# Altium PCB PCB1.PcbDoc
Units mm, origin at the board's own origin, x right, y up, seen from the top; angles counter-clockwise.
Board outline 40 x 30 mm, 2 copper layers (Top Layer, Bottom Layer); 20 components, 9 nets, 40 pads, 357 vias.
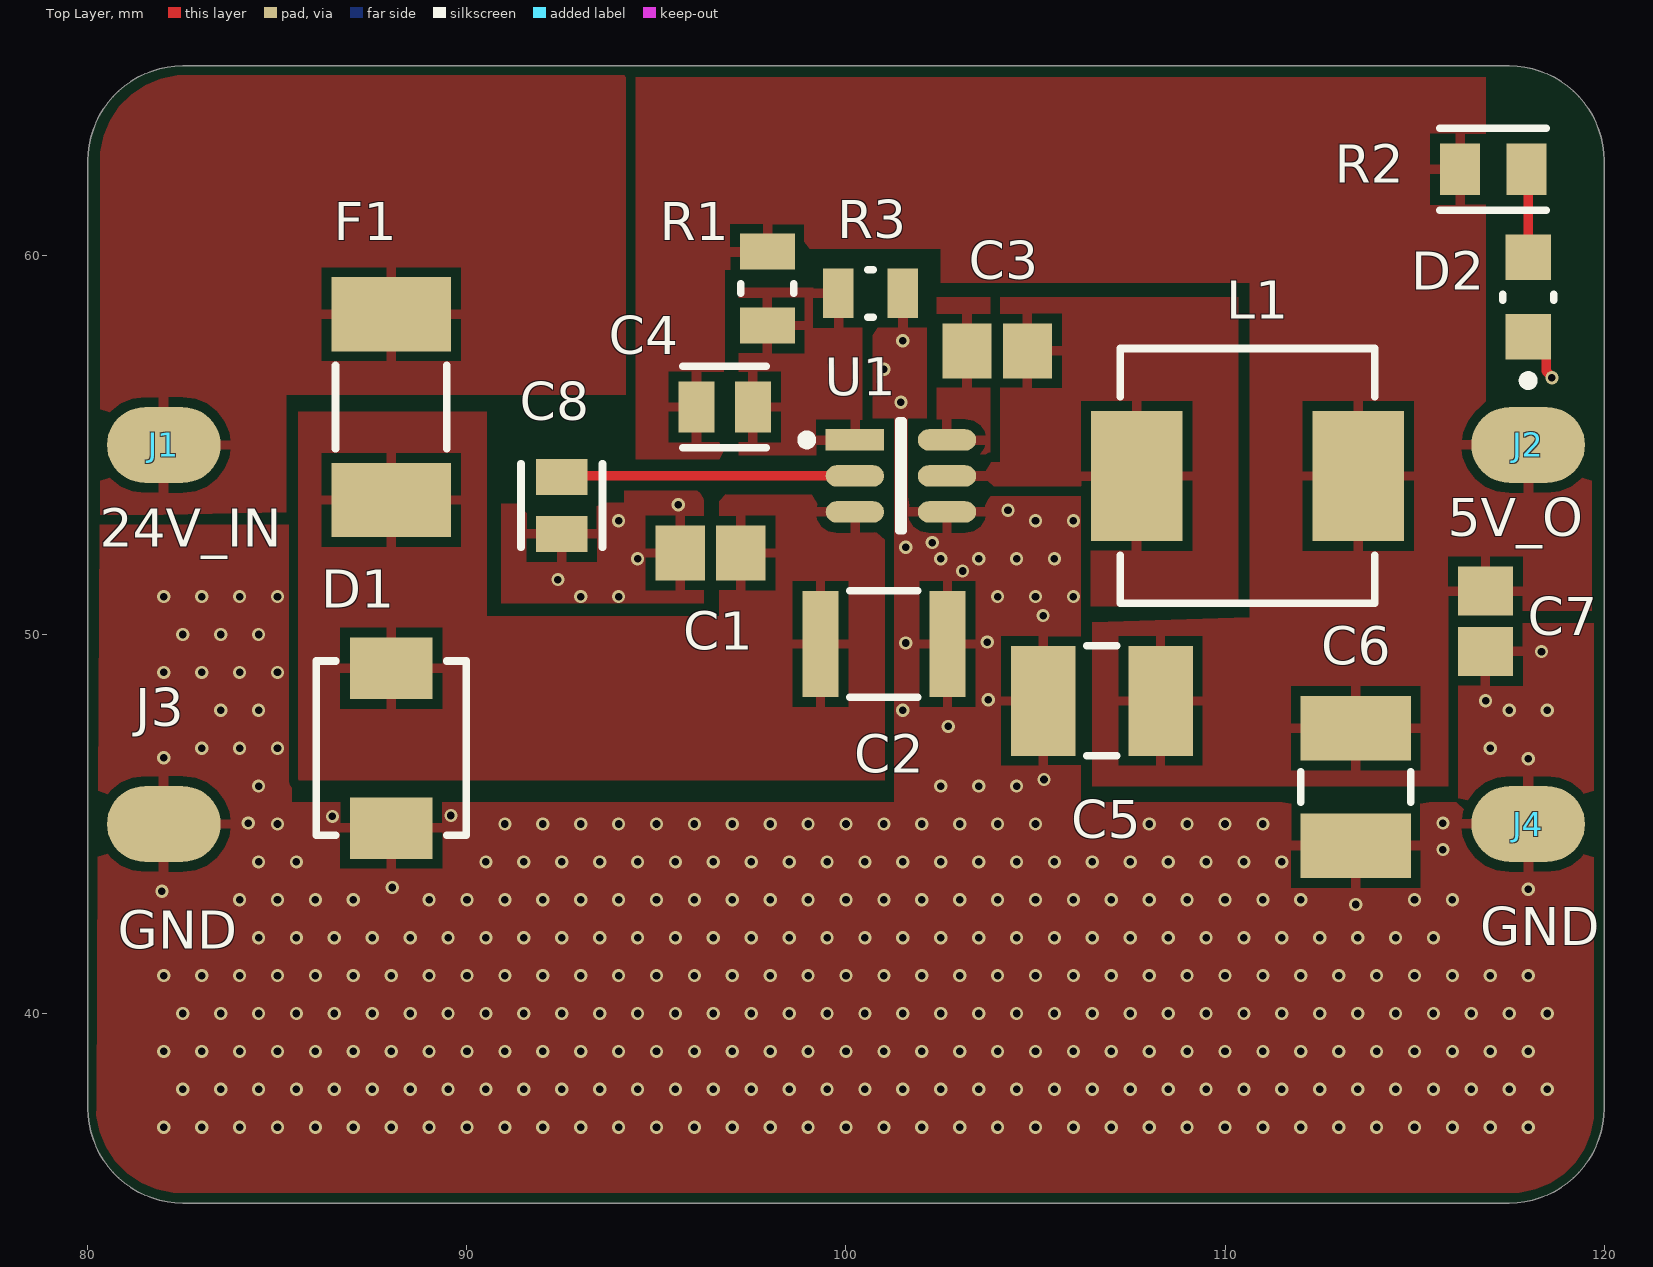
[diagram p0: Top Layer view]
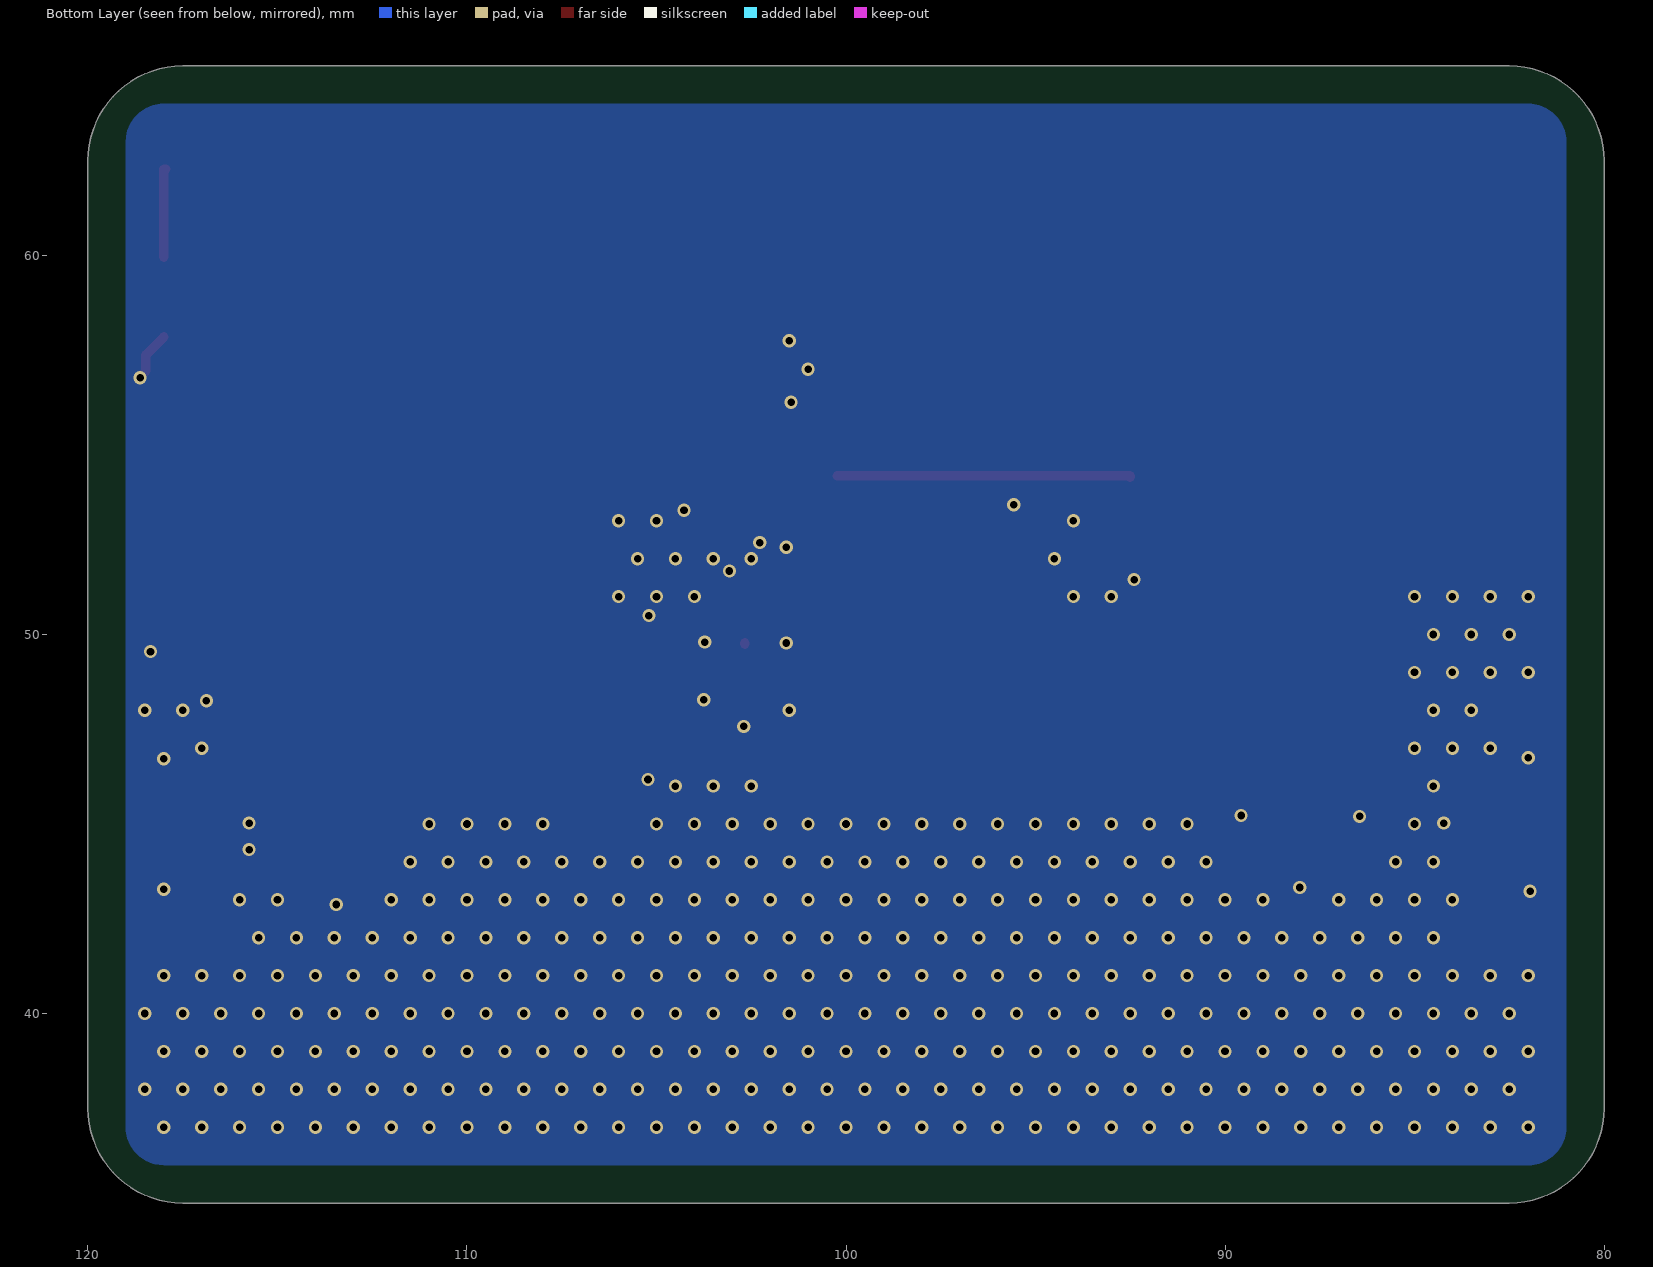
[diagram p1: Bottom Layer view, seen from below]
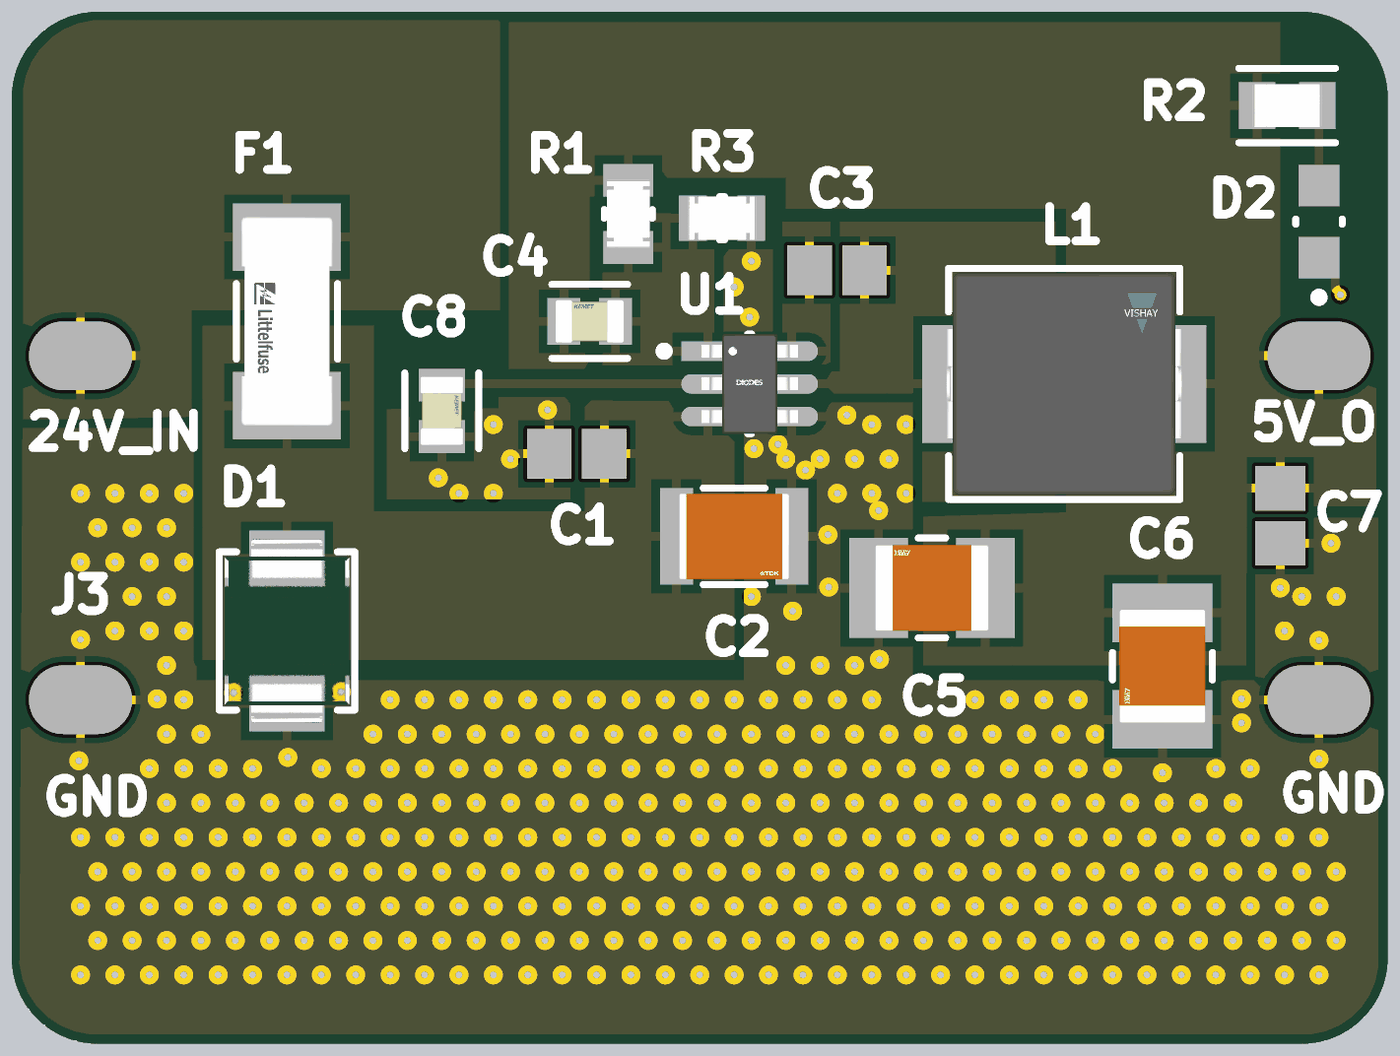
[diagram p2: 3D render of the assembled board from above, using the file's embedded part models]

## Layer stack, top to bottom
Top Solder: solder mask 0.0102, Solder Resist, Dk 3.5
Top Layer: signal copper 0.0356
Dielectric 1: dielectric 0.32, FR-4, Dk 4.8
Bottom Layer: signal copper 0.0356
Bottom Solder: solder mask 0.0102, Solder Resist, Dk 3.5

## Board outline
80,37.5 80,62.5 cw(c82.5,62.5) 82.5,65 117.5,65 cw(c117.5,62.5) 120,62.5 120,37.5 cw(c117.5,37.5) 117.5,35 82.5,35 cw(c82.5,37.5)

## Design rules (kind name [scope] priority, off if disabled: settings)
Clearance [All] p1: gap=0.254 ignorepadtopadclearanceinfootprint=FALSE
MinimumSolderMaskSliver pads [InPadClass('All Pads')] p1: minsoldermaskwidth=0.09
MinimumSolderMaskSliver [All] p2: minsoldermaskwidth=0.1
PolygonConnect ground_vias [InNet('GND') vs InNet('GND')] p1: thpad.connectstyle=Direct thpad.reliefconductorwidth=0.254 thpad.reliefentries=4 thpad.polygonreliefangle="90 Angle" thpad.airgapwidth=0.254 smdpad.connectstyle=Relief smdpad.reliefconductorwidth=0.254 smdpad.reliefentries=4 smdpad.polygonreliefangle="90 Angle" smdpad.airgapwidth=0.254 via.connectstyle=Direct via.reliefconductorwidth=0.254 via.reliefentries=4 via.polygonreliefangle="90 Angle" via.airgapwidth=0.254
PolygonConnect [All] p2: connectstyle=Relief reliefconductorwidth=0.254 reliefentries=4 polygonreliefangle="90 Angle" airgapwidth=0.254
RoutingVias [All] p1: holewidth=0.2 width=0.35 viastyle="Through Hole" minholewidth=0.2 minwidth=0.35 maxholewidth=0.711 maxwidth=1.27
SilkToSolderMaskClearance [IsPad] p1: minsilkscreentomaskgap=0.15 clearancetoexposedcopper=TRUE
SolderMaskExpansion [All] p1: expansion=0.102 istentingtop=FALSE
SupplyNets "Schematic Supply Nets_1" [InNet('GND')] p1: voltage=0.000
SupplyNets "Schematic Supply Nets" [InNet('24V0')] p2: voltage=0.000
Width [All] p1: maxlimit=0.254 minlimit=0.254 preferedwidth=0.254
28 further rules are at their usual default settings.

## Components (designator, comment, footprint, x,y, rotation, side; value= is the part's Value field where it differs from the comment)
C1 "100n" CAPC2013X140X50NL20T25 96.425,52.15 r0 top
C2 "10u" FP-C3225-250-0_4-IPC_B 101,49.75 r0 top
C3 "100n" CAPC2013X140X50NL20T25 103.99,57.486 r180 top
C4 "56p" FP-C0805C-DN-MFG 96.8,56 r0 top value="56 pF"
C5 "22u" FP-1210-L_3_3_0_4-W_2_5_0-IPC_A 106.75,48.25 r180 top
C6 "22u" FP-1210-L_3_3_0_4-W_2_5_0-IPC_A 113.45,45.975 r270 top
C7 "100n" CAPC2013X140X50NL20T25 116.875,50.35 r90 top
C8 "22n" FP-C0805C-DN-MFG 92.5,53.4 r270 top value=22nF
D1 "SMBJ33CA-TR" FP-SMB-CA-MFG 88,47 r90 top
D2 "HSMS-C170" FP-HSMS-C170-MFG 118,58.9 r90 top
F1 "0452001.MRL" FP-0452-MFG 88,56 r270 top value=0.225Ω
J1 "SMT_PAD_3mmx2mm" SMT_PAD_3mmx2mm 82,55 r0 top
J2 "SMT_PAD_3mmx2mm" SMT_PAD_3mmx2mm 118,55 r0 top
J3 "SMT_PAD_3mmx2mm" SMT_PAD_3mmx2mm 82,45 r0 top
J4 "SMT_PAD_3mmx2mm" SMT_PAD_3mmx2mm 118,45 r0 top
L1 "6.8u" FP-IHLP-2525CZ-FP_2_413x3-MFG 110.594,54.184 r0 top
R1 "158k" FP-CRCW0805-e3-MFG 97.925,59.125 r90 top
R2 "1k" FP-CR0805-IPC_B 117.075,62.275 r180 top
R3 "30.1k" FP-CRCW0805-e3-IPC_C 100.649,59 r180 top
U1 "AP63300WU-7" FP-TSOT26-IPC_A 101.45,54.184 r0 top

## Footprints (in the part's own frame and the unit in brackets; to place one, negate y for a bottom-side part, rotate by r counter-clockwise, add the part's x,y. Pads: shape width x height; smd on the part's side, far side on the other; paste and mask are expansions set on the pad)
CAPC2013X140X50NL20T25 [mm] "Chip Capacitor, 2-Leads, Body 2.00x1.25mm, IPC Medium Density"
  rect 1.3x1.45 smd: 1(-0.8,0) 2(0.8,0)
  body extent -1.1,-0.72 1.1,0.72, height 1.4
FP-0452-MFG [mil]
  rect 77x124 smd paste+0 mask+0: 1(-96.5,0) 2(96.5,0)
  silkscreen extent -43,-58 43,58, body extent -139,-66 139,66, height 10
FP-1210-L_3_3_0_4-W_2_5_0-IPC_A [mm]
  rect 1.703x2.904 smd paste+0 mask+0: 1(-1.55,0) 2(1.55,0)
  silkscreen extent -0.4,-1.45 0.4,1.45, body extent -2.9,-1.95 2.9,1.95, height 0.25
FP-C0805C-DN-MFG [mm]
  rect 0.95x1.35 smd paste+0 mask+0: 1(-0.75,0) 2(0.75,0)
  silkscreen extent -1.1,-1.07 1.1,1.07, body extent -1.4,-0.85 1.4,0.85, height 0.25
FP-C3225-250-0_4-IPC_B [mm]
  rect 0.953x2.804 smd paste+0 mask+0: 1(-1.675,0) 2(1.675,0)
  silkscreen extent -0.9,-1.4 0.9,1.4, body extent -2.4,-1.65 2.4,1.65, height 0.25
FP-CR0805-IPC_B [mm]
  rect 1.058x1.362 smd paste+0 mask+0: 1(-0.877,0) 2(0.877,0)
  silkscreen extent -1.41,-1.08 1.41,1.08, body extent -1.66,-0.93 1.66,0.93, height 0.25
FP-CRCW0805-e3-IPC_C [mil]
  rect 31.75x51.5 smd paste+0 mask+0: 1(-33.5,0) 2(33.5,0)
  silkscreen extent -3,-25 3,25, body extent -53,-31 53,31, height 10
FP-CRCW0805-e3-MFG [mm]
  rect 0.95x1.45 smd paste+0 mask+0: 1(-0.975,0) 2(0.975,0)
  silkscreen extent -0.13,-0.7 0.13,0.7, body extent -1.55,-0.82 1.55,0.82, height 0.25
FP-HSMS-C170-MFG [mm]
  rect 1.2x1.2 smd paste+0 mask+0: 1(-1.05,0) 2(1.05,0)
  silkscreen extent -2.32,-0.67 0.08,0.67
FP-IHLP-2525CZ-FP_2_413x3-MFG [mil]
  rect 95x135 smd paste+0 mask+0: 1(-115,0) 2(115,0)
  silkscreen extent -132,-132 132,132, body extent -166,-136 166,136, height 10
FP-SMB-CA-MFG [mm]
  rect 1.62x2.18 smd paste+0 mask+0: 1(-2.11,0) 2(2.11,0)
  silkscreen extent -2.3,-1.97 2.3,1.97, body extent -3.02,-2.07 3.02,2.07, height 0.25
FP-TSOT26-IPC_A [mm]
  rect 1.54x0.566 smd paste+0 mask+0: 1(-1.216,0.95)
  rrect100% 1.54x0.566 smd paste+0 mask+0: 2(-1.216,0) 3(-1.216,-0.95) 4(1.216,-0.95) 5(1.216,0) 6(1.216,0.95)
  silkscreen extent -2.61,-1.45 0.05,1.45, body extent -2.49,-1.95 2.49,1.95, height 0.25
SMT_PAD_3mmx2mm [mm]
  oval 3x2 smd: 0(0,0)

## Part data
C1 C3 C7: library part CMP-2007-04629-1, Manufacturer="AVX Interconnect / Elco", Part Number=08055C104K4Z2A
C2: library part CMP-08246-002749-1, "Multilayer Ceramic Capacitors 10uF ±10% 50V X5R SMD 1210", Capacitance=10uF, Case Code (Imperial)=1210, Case Code (Metric)=3225, Dielectric=X5R, Dielectric Material=Ceramic, Max Operating Temperature=85°C, Min Operating Temperature=-55°C, Package Quantity=1, Tolerance=10%, Voltage Rating=50V, Case/Package=1210, Depth=2.5mm, Height=2.5mm, Lead Free="Lead Free", Length=3.2mm, Mount="Surface Mount", Packaging="Tape and Reel", Resistor Type=Ceramic, RoHS Compliant=Yes, Series=C, Termination=SMD/SMT, Thickness=0.11inch, Voltage Rating (DC)=50V, Weight=0.000564oz, Width=0.098inch
C4: library part CMP-2007-00050-2, "CAP CER 56PF 50V C0G/NP0 0805", Capacitance="56 pF", Manufacturer=KEMET, Manufacturer Part Number=C0805C560J5GACTU, Package=C0805C-DN, Temperature="-55°C to +125°C", Temperature Characteristic=C0G, Temperature Coefficient=30ppm/°C, Temperature Range High=+125°C, Temperature Range Low=-55°C, Tolerance=0.05, Voltage Rating="50 V", Automotive=No, Category=Cap, ComponentLink2Description=Datasheet, ComponentLink2URL=https://content.kemet.com/datasheets/KEM_C1003_C0G_SMD.pdf, Device Class L1="Passive Components", Device Class L2=Capacitors, Device Class L3="Ceramic Capacitors", Digikey Description="CAP CER 56PF 50V C0G/NP0 0805", Height=0.88mm, Ipc Land Pattern Name=CAPC200125X78, Lead Free=Yes, Material=Ceramic, Mouser Description="0805 C 56pF Ceramic Multilayer Capacitor, 50 VDC, +125degC, C0G Dielec, +/-5%", Octopart=https://octopart.com/c0805c560j5gactu-kemet-93783, RoHS=TRUE
C5 C6: library part CMP-1038-02285-3, "General Purpose Ceramic Capacitor, 1210, 22uF, 20%, X5R, 15%, 25V", Capacitance=22uF, Case Code (Imperial)=1210, Case Code (Metric)=3225, Dielectric=X5R, Dielectric Material=Ceramic, Insulation Resistance=10GR, Max Operating Temperature=85°C, Min Operating Temperature=-55°C, Package Quantity=1, Tolerance=20%, Voltage=25V, Case/Package=1210, Construction=Flat, Contact Plating=Tin, Depth=2.5mm, Dissipation Factor=12.5%, Height=2.79mm, Lead Free="Lead Free", Length=3.2mm, Mount="Surface Mount", Number of Pins=2, Packaging="Tape and Reel", Radiation Hardening=No, REACH SVHC="No SVHC", RoHS Compliant=Yes, Series=-, Termination=SMD/SMT, Thickness=0.11inch, Voltage Rating=25V, Voltage Rating (DC)=25V, Width=2.5mm
C8: library part CMP-2007-00338-2, "CAP CER 0.022UF 50V X7R 0805", Capacitance=22nF, Manufacturer=KEMET, Manufacturer Part Number=C0805C223K5RACTU, Package=C0805C-DN, Temperature="-55°C to +125°C", Temperature Characteristic=X7R, Temperature Coefficient=30ppm/°C, Temperature Range High=+125°C, Temperature Range Low=-55°C, Tolerance=0.1, Voltage Rating="50 V", Automotive=No, Category=Cap, ComponentLink2Description=Datasheet, ComponentLink2URL=https://content.kemet.com/datasheets/KEM_C1003_C0G_SMD.pdf, Device Class L1="Passive Components", Device Class L2=Capacitors, Device Class L3="Ceramic Capacitors", Digikey Description="CAP CER 0.022UF 50V X7R 0805", Height=0.88mm, Ipc Land Pattern Name=CAPC200125X78, Lead Free=Yes, Material=Ceramic, Mouser Description="Capacitor; Ceramic; Cap; .022uF; Tol 10%; SMT; Vol-Rtg 50V; X7R; Tape and Reel", Octopart=https://octopart.com/c0805c223k5ractu-kemet-145968, RoHS=TRUE
D1: library part CMP-12225-000040-1, "TVS DIODE 33V 69.7V SMB", Breakdown Voltage=36.7V, Clamping Voltage=53.3V, Manufacturer=STMicroelectronics, Max Junction Temp=+150°C, Package=SMB-CA, Peak Pulse Current=11.8A, Peak Pulse Power=600W, Reverse Standoff Voltage=33V, Temperature="-55°C to +150°C", Temperature Range Low=-55°C, Automotive=No, Category=Diode, ComponentLink2Description=Datasheet, ComponentLink2URL=https://www.st.com/resource/en/datasheet/smbj.pdf, Device Class L1="Circuit Protection", Device Class L2="TVS Diodes", Device Class L3=unset, Digikey Description="TVS DIODE 33V 69.7V SMB", Direction=Bidirectional, Height=2.65mm, Lead Free=Yes, Manufacturer Part Number=SMBJ33CA-TR, Mouser Description="TVS Diodes - Transient Voltage Suppressors 600W 33V Bidirect", Number Of Channels=1, Octopart=https://octopart.com/smbj33ca-tr-stmicroelectronics-347069, RoHS=TRUE, Standoff Height=0.05mm, Temperature Range High=+150°C
D2: library part CMP-18399-000018-1, "LED RED DIFFUSED CHIP SMD", Case Code (Imperial)=0805, Case Code (Metric)=2012, Color=Red, Forward Current=20mA, Forward Voltage=2.1V, Lens Color=White, Max Operating Temperature=85°C, Min Operating Temperature=-40°C, Package Quantity=1, Power Dissipation=52mW, Reverse Voltage=5V, Case/Package=0805, Depth=1.25mm, Dominant Wavelength=626nm, Height=0.8mm, Illumination Color=Red, Lead Free="Lead Free", Length=2mm, Lens Style=Diffused, Lens Transparency=Diffused, Luminous Intensity=10mcd, Mount="Surface Mount", Number of Elements=1, Number of LEDs=1, Number of Pins=2, Number of Terminals=2, Packaging="Tape and Reel", Power Rating=52mW, Radiation Hardening=No, REACH SVHC="No SVHC", Shape=Rectangular, Test Current=20mA, Viewing Angle=170°, Wavelength=626nm, Width=1.25mm
F1: library part CMP-08605-000042-1, "FUSE BRD MNT 1A 125VAC/VDC 2SMD", Fuse Current=1A, Fuse Interrupt Ac Current=50A, Fuse Interrupt Dc Current=300A, Manufacturer="Littelfuse Inc", Max Fuse Ac Voltage=125V, Package=0452, Resistance=0.225Ω, Temperature="-55°C to +125°C", Temperature Range High=+125°C, Temperature Range Low=-55°C, Automotive=No, Category=Fuse, ComponentLink2Description=Datasheet, ComponentLink2URL=https://www.littelfuse.com/~/media/electronics/datasheets/fuses/littelfuse_fuse_452_454_datasheet.pdf.pdf, Device Class L1="Circuit Protection", Device Class L2=Fuses, Device Class L3=unset, Digikey Description="FUSE BRD MNT 1A 125VAC/VDC 2SMD", Fuse Blow Speed=Slow, Fuse I2T=1.98A2Sec, Height=2.94mm, Lead Free=Yes, Manufacturer Part Number=0452001.MRL, Max Fuse Dc Voltage=125V, Mouser Description="Surface Mount Fuses 125V 1A", Octopart=https://octopart.com/0452001.mrl-littelfuse-566112, RoHS=TRUE, Voltage Rating=125V
L1: library part CMP-02424-000104-1, "Commercial Inductors, High Saturation Series 6.8uH 4.5A 60mΩ 20%", Case Code (Imperial)=2525, Case Code (Metric)=6363, Current Rating=4.5A, DC Resistance (DCR)=60mR, Inductance=6.8uH, Inductance Tolerance=20%, Max DC Current=8A, Max Operating Temperature=125°C, Min Operating Temperature=-55°C, Package Quantity=2000, Self Resonant Frequency=5MHz, Test Frequency=100kHz, Case/Package=2525, Contact Plating=Tin, Core Material=Metal, Depth=6.72mm, Height=3mm, Height - Seated (Max)=0.118inch, Lead Free="Lead Free", Length=7.24mm, Military Standard=Not, Mount="Surface Mount", Number of Pins=2, Packaging="Tape and Reel", Radiation Hardening=No, RMS Current (Irms)=4.5A, Saturation Current=8A, Shielding=Shielded, Termination=SMD/SMT, Tolerance=20%, Width=0.255inch
R1: library part CMP-1013-00756-3, "RES Thick Film, 158kΩ, 1%, 0.125W, 100ppm/°C, 0805", Case Code (Imperial)=0805, Case Code (Metric)=2012, Max Operating Temperature=155°C, Max Power Dissipation=125mW, Min Operating Temperature=-55°C, Package Quantity=10, Resistance=158kR, Temperature Coefficient=100ppm/°C, Tolerance=1%, Voltage Rating=150V, Case/Package=0805, Composition="Thick Film", Contact Plating=Tin, Depth=1.25mm, Features="Automotive AEC-Q200", Height=0.02inch, Lead Free="Lead Free", Length=2mm, Military Standard=Not, Number of Pins=2, Number of Terminations=2, Packaging="Tape and Reel", Power Rating=125mW, Radiation Hardening=No, Termination=SMD/SMT, Voltage Rating (DC)=150V, Weight=0.000194oz, Width=0.049inch
R2: library part CMP-07231-005482-1, "Thick Film Chip Resistors 0805 1kΩ 0.125W 1% 100ppm/°C", Case Code (Imperial)=0805, Case Code (Metric)=2012, Max Operating Temperature=155°C, Max Power Dissipation=125mW, Min Operating Temperature=-55°C, Package Quantity=1, Resistance=1kR, Temperature Coefficient=100ppm/°C, Tolerance=1%, Voltage Rating=150V, Case/Package=0805, Composition="Thick Film", Contact Plating=Tin, Depth=1.25mm, Features="Moisture Resistant", Height=0.5mm, Length=2mm, Mount="Surface Mount", Number of Pins=2, Number of Terminations=2, Packaging="Tape and Reel", Power Rating=125mW, Radiation Hardening=No, REACH SVHC="No SVHC", Termination=SMD/SMT, Thickness=508um, Voltage Rating (DC)=150V, Width=1.25mm
R3: library part CMP-1013-00676-3, "RES Thick Film, 30.1kΩ, 1%, 0.125W, 100ppm/°C, 0805", Case Code (Imperial)=0805, Case Code (Metric)=2012, Max Operating Temperature=155°C, Max Power Dissipation=125mW, Min Operating Temperature=-55°C, Package Quantity=10, Resistance=30.1kR, Temperature Coefficient=100ppm/°C, Tolerance=1%, Voltage Rating=150V, Case/Package=0805, Composition="Thick Film", Contact Plating=Tin, Depth=1.25mm, Features="Automotive AEC-Q200", Height=0.45mm, Lead Free="Lead Free", Length=2mm, Military Standard=Not, Mount="Surface Mount", Number of Terminations=2, Packaging="Tape and Reel", Power Rating=125mW, Radiation Hardening=No, Termination=SMD/SMT, Voltage Rating (DC)=150V, Weight=0.000194oz, Width=1.25mm
U1: library part CMP-12757-000025-1, "DCDC CONV HV BUCK TSOT26"

## Via types
v1: diameter 0.35, hole 0.2, Top Layer to Bottom Layer, 357 vias

## Nets (pads, with @x,y where several pads share a name; then routed paths per layer and width w, separated by ;. In a path a pad name is that pad's centre, name@x,y a point inside that pad or via, vN(x,y) a via of type N, cw(c..) or ccw(c..) an arc to the next point about the centre after c; other vN are vias at no path point)
5V0OUT: C4.1 C5.1 C6.1 C7.2 J2.0 L1.2 R1.2 R2.2
24V0: F1.1 J1.0
24V0F: C1.2 C2.1 D1.2 F1.2 U1.3
BST: C3.2 U1.6
EN: C8.1 U1.2 | length 7.8
  Top Layer w0.254: C8.1 92.5,54.184 U1.2
FB: C4.2 R1.1 R3.2 U1.1
GND: C1.1 C2.2 C5.2 C6.2 C7.1 C8.2 D1.1 D2.1 J3.0 J4.0 R3.1 U1.4 | length 1.4
  Top Layer w0.254: C2.2 C2.2@102.675,49.775 ; D2.1 118.473,57.377 118.473,56.953 118.625,56.801 v1(118.625,56.775)
  other v1: 82,37 83,37 84,37 85,37 86,37 87,37 88,37 89,37 90,37 91,37 92,37 93,37 94,37 95,37 96,37 97,37 98,37 99,37 100,37 101,37 102,37 103,37 104,37 105,37 106,37 107,37 108,37 109,37 110,37 111,37 112,37 113,37 114,37 115,37 116,37 117,37 118,37 82.5,38 83.5,38 84.5,38 85.5,38 86.5,38 87.5,38 88.5,38 89.5,38 90.5,38 91.5,38 92.5,38 93.5,38 94.5,38 95.5,38 96.5,38 97.5,38 98.5,38 99.5,38 100.5,38 101.5,38 102.5,38 103.5,38 104.5,38 105.5,38 106.5,38 107.5,38 108.5,38 109.5,38 110.5,38 111.5,38 112.5,38 113.5,38 114.5,38 115.5,38 116.5,38 117.5,38 118.5,38 82,39 83,39 84,39 85,39 86,39 87,39 88,39 89,39 90,39 91,39 92,39 93,39 94,39 95,39 96,39 97,39 98,39 99,39 100,39 101,39 102,39 103,39 104,39 105,39 106,39 107,39 108,39 109,39 110,39 111,39 112,39 113,39 114,39 115,39 116,39 117,39 118,39 82.5,40 83.5,40 84.5,40 85.5,40 86.5,40 87.5,40 88.5,40 89.5,40 90.5,40 91.5,40 92.5,40 93.5,40 94.5,40 95.5,40 96.5,40 97.5,40 98.5,40 99.5,40 100.5,40 101.5,40 102.5,40 103.5,40 104.5,40 105.5,40 106.5,40 107.5,40 108.5,40 109.5,40 110.5,40 111.5,40 112.5,40 113.5,40 114.5,40 115.5,40 116.5,40 117.5,40 118.5,40 82,41 83,41 84,41 85,41 86,41 87,41 88,41 89,41 90,41 91,41 92,41 93,41 94,41 95,41 96,41 97,41 98,41 99,41 100,41 101,41 102,41 103,41 104,41 105,41 106,41 107,41 108,41 109,41 110,41 111,41 112,41 113,41 114,41 115,41 116,41 117,41 118,41 84.5,42 85.5,42 86.5,42 87.5,42 88.5,42 89.5,42 90.5,42 91.5,42 92.5,42 93.5,42 94.5,42 95.5,42 96.5,42 97.5,42 98.5,42 99.5,42 100.5,42 101.5,42 102.5,42 103.5,42 104.5,42 105.5,42 106.5,42 107.5,42 108.5,42 109.5,42 110.5,42 111.5,42 112.5,42 113.5,42 114.5,42 115.5,42 113.45,42.875 84,43 85,43 86,43 87,43 89,43 90,43 91,43 92,43 93,43 94,43 95,43 96,43 97,43 98,43 99,43 100,43 101,43 102,43 103,43 104,43 105,43 106,43 107,43 108,43 109,43 110,43 111,43 112,43 115,43 116,43 81.95,43.225 118,43.275 88.025,43.325 84.5,44 85.5,44 90.5,44 91.5,44 92.5,44 93.5,44 94.5,44 95.5,44 96.5,44 97.5,44 98.5,44 99.5,44 100.5,44 101.5,44 102.5,44 103.5,44 104.5,44 105.5,44 106.5,44 107.5,44 108.5,44 109.5,44 110.5,44 111.5,44 115.75,44.325 85,45 91,45 92,45 93,45 94,45 95,45 96,45 97,45 98,45 99,45 100,45 101,45 102,45 103,45 104,45 105,45 108,45 109,45 110,45 111,45 84.225,45.025 115.75,45.025 86.45,45.2 89.575,45.225 84.5,46 102.5,46 103.5,46 104.5,46 105.225,46.175 118,46.725 82,46.75 83,47 84,47 85,47 117,47 102.7,47.575 83.5,48 84.5,48 101.5,48 117.5,48 118.5,48 116.875,48.25 103.75,48.275 82,49 83,49 84,49 85,49 118.35,49.55 101.575,49.775 103.725,49.8 82.5,50 83.5,50 84.5,50 105.2,50.5 82,51 83,51 84,51 85,51 93,51 94,51 104,51 105,51 106,51 92.4,51.45 103.075,51.675 94.5,52 102.5,52 103.5,52 104.5,52 105.5,52 101.575,52.3 102.275,52.425 94,53 105,53 106,53 104.275,53.275 95.575,53.425 101.45,56.125 101,57 101.5,57.75
NetD2_2: D2.2 R2.1 | length 2.4
  Top Layer w0.254: R2.1 118,62.275 D2.2
SW: C3.1 L1.1 U1.5

## Polygon pours and split planes (outlines as drawn)
GND on Top Layer "GND_AP63300" (solid, pour order 1): 100.7,55.7 100.7,59.8 102.125,59.8 102.125,55.7 101.625,55.7 101.625,53.65 106.2,53.65 106.2,42.575 101.275,42.575 101.275,52.625 101.275,55.7
GND on Top Layer "GND_EN" (solid, pour order 9): 90.9,53.45 90.9,50.825 96.3,50.825 96.3,53.825 94.15,53.825 94.15,53.475
24V0 on Top Layer "24V0_TOP" (solid, pour order 8): 80.325,53.125 80.325,62.5 cw(c82.575,62.5) 82.575,64.75 94.3,64.75 94.3,56.325 85.225,56.325 85.225,53.225
FB on Top Layer "SW_TOP" (solid, pour order 4): 101.1,55.525 101.1,54.725 97.175,54.725 97.175,59.15 100.425,59.15 100.425,55.525
5V0OUT on Top Layer "5V0OUT_TOP" (solid, pour order 7): 106.5,50.325 106.5,46 115.925,46 115.925,50.625 119.675,50.625 119.675,56.15 116.875,56.15 116.875,64.7 94.45,64.7 94.45,54.625 96.8,54.625 96.8,59.625 99.05,59.625 99.05,60.175 102.5,60.175 102.5,59.275 110.65,59.275 110.65,50.45
GND on Top Layer "GND_RIGHT_SIDE" (solid, pour order 6): 80.312,52.9 85.375,52.9 85.375,45.575 116.15,45.575 116.15,50.3 119.725,50.3 119.725,37.45 cw(c117.55,37.45) 117.55,35.275 82.475,35.275 cw(c82.475,37.525) 80.225,37.538
24V0F on Top Layer "24V0F_TOP" (solid, pour order 5): 101.125,53.674 101.125,46.15 85.55,46.15 85.55,55.875 90.525,55.875 90.525,50.475 96.65,50.475 96.65,53.699
BST on Top Layer "BST_TOP" (solid, pour order 3): 102,55.475 102,54.75 103.8,54.75 103.8,58.9 102.4,58.9 102.4,55.475
SW on Top Layer "SW_TOP" (solid, pour order 2): 101.875,54.55 101.875,53.65 106.325,53.65 106.325,50.75 110.35,50.75 110.35,58.9 104.075,58.9 104.075,54.55
GND on Bottom Layer "GND_POLYGON" (solid, pour order 0): 81,63 cw(c82,63) 82,64 118,64 cw(c118,63) 119,63 119,37 cw(c118,37) 118,36 82,36 cw(c82,37) 81,37

## Silkscreen, mask and mechanical layers (free items; w line width, h text height)
Top Overlay:
  text "5V_O" at 115.879,52.596 h1
  text "24V_IN" at 80.304,52.321 h1
  text "GND" at 116.729,41.804 h1
  text "GND" at 80.779,41.704 h1
Mechanical 1:
  the board outline again, w0.254